# EAGLE board ftpiled5 (EAGLE 7.7.0)
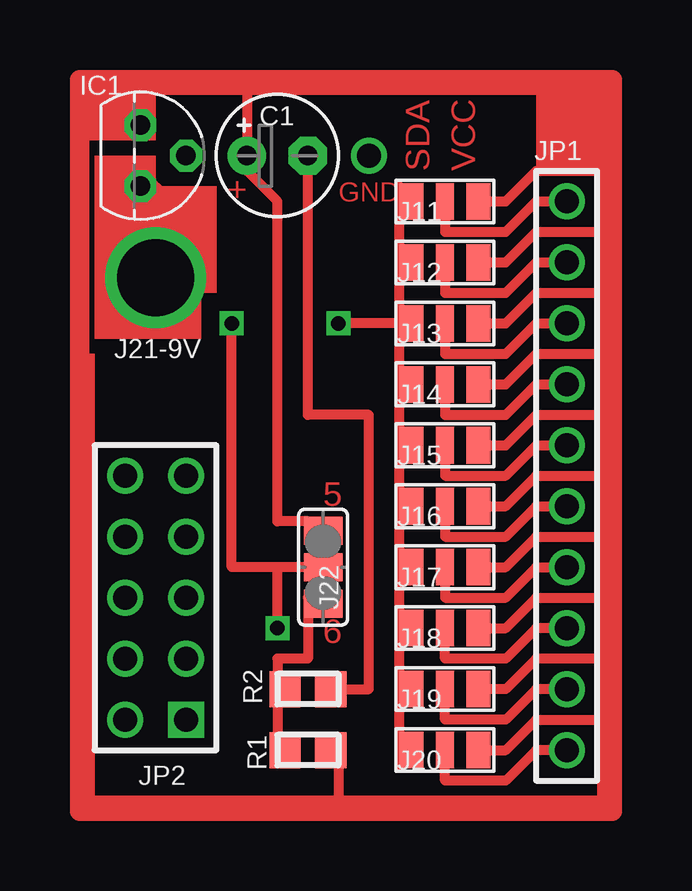
[diagram p0: board, top side]
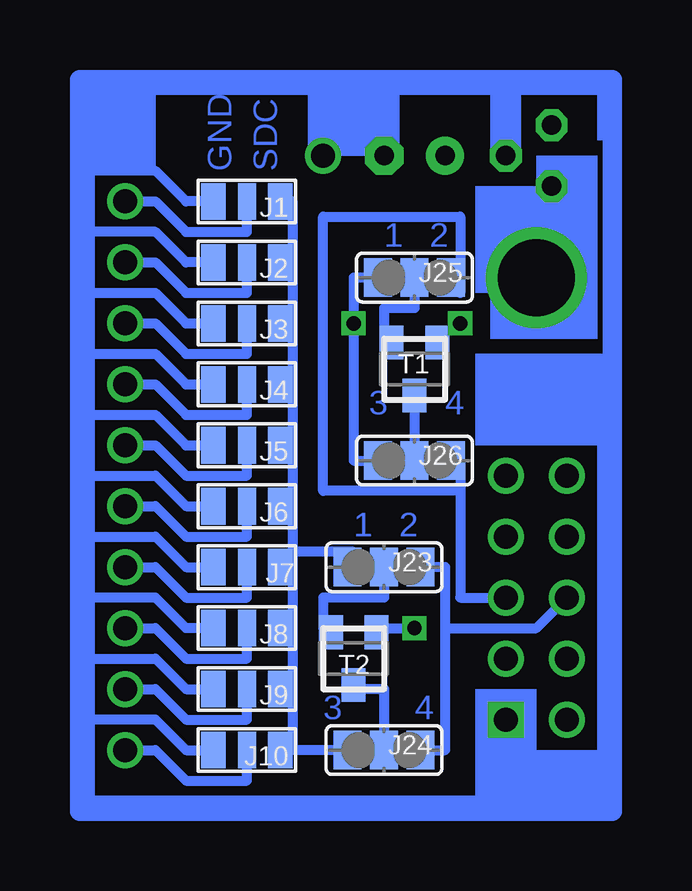
[diagram p1: board, bottom side, seen from below]

No outline drawn. Coordinates in mm, seen from the top.
Copper layers (1*16): Top 0.035mm / dielectric 1.5mm / Bottom 0.035mm
Design rules "default": minimum track width 10mil, minimum drill 24mil, track to track 8mil, track to pad 8mil, pad to pad 8mil, via to via 8mil, smd to smd 8mil, copper to edge 40mil, drill to drill 8mil, minimum pad ring 10mil, minimum via ring 8mil, stop-mask expansion 4mil, vias tented up to drill 0mil, thermal gap 10mil

## Footprints (pad centres in the part's own frame; a part is rotated, then mirrored left to right if it is on the bottom)
E2,5-5 = drill 0.813 pad 1.6: + -1.27,0 | drill 0.813 pad 1.6 octagon: - 1.27,0
TO92 = drill 0.813 octagon: 1 -1.27,0; 2 0,1.905; 3 1.27,0
JUMP-3 = smd 1.016 x 1.524: 1 -1.397,0; 3 1.397,0 | smd 0.762 x 1.524: 2 0,0
SJ_2 = smd 1.168 x 1.6: 1 -1.524,0; 2 0,0; 3 1.524,0
R0805 = smd 1.3 x 1.5: 1 -0.95,0; 2 0.95,0
SOT23 = smd 1 x 1.4: 1 -0.95,-1.1; 2 0.95,-1.1; 3 0,1.1

## Placement (x,y rotation side)
C1  [E2,5-5]  11.43,69.22 0 top
IC1  [TO92]  5.71,69.22 270 top
J1  [JUMP-3]  18.41,67.31 0 bottom
J2  [JUMP-3]  18.41,64.77 0 bottom
J3  [JUMP-3]  18.41,62.23 0 bottom
J4  [JUMP-3]  18.41,59.69 0 bottom
J5  [JUMP-3]  18.41,57.15 0 bottom
J6  [JUMP-3]  18.41,54.61 0 bottom
J7  [JUMP-3]  18.41,52.07 0 bottom
J8  [JUMP-3]  18.41,49.53 0 bottom
J9  [JUMP-3]  18.41,46.99 0 bottom
J10  [JUMP-3]  18.41,44.45 0 bottom
J11  [JUMP-3]  18.41,67.31 0 top
J12  [JUMP-3]  18.41,64.77 0 top
J13  [JUMP-3]  18.41,62.23 0 top
J14  [JUMP-3]  18.41,59.69 0 top
J15  [JUMP-3]  18.41,57.15 0 top
J16  [JUMP-3]  18.41,54.61 0 top
J17  [JUMP-3]  18.41,52.07 0 top
J18  [JUMP-3]  18.41,49.53 0 top
J19  [JUMP-3]  18.41,46.99 0 top
J20  [JUMP-3]  18.41,44.45 0 top
J22  [SJ_2]  13.34,52.07 90 top
J23  [SJ_2]  12.7,52.07 0 bottom
J24  [SJ_2]  12.7,44.45 0 bottom
J25  [SJ_2]  11.43,64.14 0 bottom
J26  [SJ_2]  11.43,56.52 0 bottom
R1  [R0805]  12.7,44.45 180 top
R2  [R0805]  12.7,46.99 180 top
T1  [SOT23]  11.43,60.33 180 bottom
T2  [SOT23]  13.97,48.26 180 bottom

## Library data of the parts
C1 = resistor
IC1 = ref-packages
J1-J20 = smd-special
J22-J26 = jumper
R1 R2 = smd-ipc
T1 T2 = semicon-smd-ipc

## Nets
J16: J16.2
S$4: IC1.1
S$6: C1.+
S$9: J1.2
S$11: J23.2
S$12: J11.2
S$16: J12.2
S$17: J25.2
S$18: J13.2
S$21: J14.2
S$23: J15.2
S$27: J17.2
S$31: J19.2
S$32: J20.2
S$33: J2.2
S$36: J3.2
S$38: J26.2
S$40: J4.2
S$41: C1.- IC1.2
S$48: J5.2
S$49: J6.2
S$50: J7.2
S$51: J8.2
S$56: IC1.3
S$57: J9.2
S$58: J18.2
S$64: J10.2

## Tracks (layer width: path | path; a pad name or v marks a point on that pad's centre or on a via)
J16
  Top 0.406: J16.2 18.41,53.34 20.95,53.34 22.23,54.61 23.5,54.61
JP21  (via drill 3.2)
  Bottom 0.406: 6.35,67.31 v6.35,64.14
S$1
  Bottom 0.406: 16.51,67.31 16.51,52.7 | 16.51,52.7 16.51,44.45 13.97,44.45 | 13.97,52.7 16.51,52.7
S$2
  Top 0.406: 12.7,50.8 12.7,48.26 11.43,48.26 11.43,44.45
S$3
  Bottom 0.406: 19.68,67.31 20.95,67.31 22.23,68.58 25.4,68.58
S$4
  Top 0.406: IC1.1 3.17,70.48 | 13.97,44.45 13.97,41.91
  Top 0.813: 3.17,72.39 25.4,72.39 25.4,41.91 13.97,41.91 3.17,41.91 3.17,70.48 3.17,72.39
S$5  (via drill 1)
  other vias: 7.62,48.26
S$6
  Top 0.406: 12.7,53.98 11.43,53.98 11.43,67.31 10.16,68.58 C1.+ 10.16,72.39
S$8  (via drill 1)
  other vias: 15.24,69.22
S$9
  Bottom 0.406: 23.5,67.31 22.23,67.31 20.95,66.04 18.41,66.04 J1.2
S$10
  Bottom 0.406: 19.68,64.77 20.95,64.77 22.23,66.04 25.4,66.04
S$11
  Bottom 0.406: J23.2 12.7,50.8 15.24,50.8 15.24,49.53
S$12  (via drill 1)
  Top 0.406: J11.2 18.41,66.04 20.95,66.04 22.23,67.31 v23.5,67.31
S$13
  Top 0.406: 19.68,67.31 20.95,67.31 22.23,68.58 25.4,68.58
S$14
  Top 0.406: 19.68,64.77 20.95,64.77 22.23,66.04 25.4,66.04
S$15
  Top 0.406: 19.68,62.23 20.95,62.23 22.23,63.5 25.4,63.5
S$16
  Top 0.406: J12.2 18.41,63.5 20.95,63.5 22.23,64.77 23.5,64.77
S$17
  Bottom 0.406: J25.2 11.43,62.87 12.7,62.87 12.7,61.59
S$18
  Top 0.406: J13.2 18.41,60.96 20.95,60.96 22.23,62.23 23.5,62.23
S$19
  Top 0.406: 19.68,59.69 20.95,59.69 22.23,60.96 25.4,60.96
S$20  (via drill 0.6)
  Top 0.406: 16.51,43.81 16.51,62.23 | 16.51,62.23 16.51,67.94 | 16.51,62.23 v13.97,62.23
  Bottom 0.406: 12.7,64.14 13.97,64.14 v13.97,62.23 13.97,56.52 12.7,56.52
S$21
  Top 0.406: J14.2 18.41,58.42 20.95,58.42 22.23,59.69 23.5,59.69
S$22
  Top 0.406: 19.68,57.15 20.95,57.15 22.23,58.42 25.4,58.42
S$23
  Top 0.406: J15.2 18.41,55.88 20.95,55.88 22.23,57.15 23.5,57.15
S$24
  Top 0.406: 19.68,54.61 20.95,54.61 22.23,55.88 25.4,55.88
S$26
  Top 0.406: 19.68,52.07 20.95,52.07 22.23,53.34 25.4,53.34
S$27
  Top 0.406: J17.2 18.41,50.8 20.95,50.8 22.23,52.07 23.5,52.07
S$28
  Top 0.406: 19.68,49.53 20.95,49.53 22.23,50.8 25.4,50.8
S$29
  Top 0.406: 25.4,48.26 22.23,48.26 20.95,46.99 19.68,46.99
S$30
  Top 0.406: 19.68,44.45 20.95,44.45 22.23,45.72 25.4,45.72
S$31
  Top 0.406: 23.5,46.99 22.23,46.99 20.95,45.72 18.41,45.72 J19.2
S$32
  Top 0.406: 23.5,44.45 22.23,44.45 20.95,43.18 18.41,43.18 J20.2
S$33
  Bottom 0.406: 23.5,64.77 22.23,64.77 20.95,63.5 18.41,63.5 J2.2
S$34
  Bottom 0.406: 25.4,63.5 22.23,63.5 20.95,62.23 19.68,62.23
S$35
  Bottom 0.406: 25.4,60.96 22.23,60.96 20.95,59.69 19.68,59.69
S$36
  Bottom 0.406: 23.5,62.23 22.23,62.23 20.95,60.96 18.41,60.96 J3.2
S$37
  Bottom 0.406: 12.7,44.45 12.7,46.99 13.97,46.99
S$38
  Bottom 0.406: 11.43,59.05 J26.2
S$39  (via drill 1)
  other vias: 7.62,55.88
S$40
  Bottom 0.406: 22.86,59.69 22.23,59.69 20.95,58.42 18.41,58.42 J4.2
S$41
  Top 0.406: 13.97,46.99 15.24,46.99 15.24,58.42 12.7,58.42 C1.-
  Bottom 0.406: C1.- 12.7,72.39 | 19.68,44.45 20.95,44.45 22.23,45.72 25.4,45.72 | 7.62,45.72 7.62,41.91 | 7.62,72.39 IC1.2
  Bottom 0.813: 7.62,41.91 25.4,41.91 25.4,45.72 25.4,72.39 12.7,72.39 7.62,72.39 3.17,72.39 3.17,41.91 7.62,41.91
S$42
  Bottom 0.406: 25.4,58.42 22.23,58.42 20.95,57.15 19.68,57.15
S$43  (via drill 1)
  other vias: 5.08,55.88
S$44
  Bottom 0.406: 25.4,55.88 22.23,55.88 20.95,54.61 19.68,54.61
S$45
  Bottom 0.406: 25.4,53.34 22.23,53.34 20.95,52.07 19.68,52.07
S$46
  Bottom 0.406: 19.68,49.53 20.95,49.53 22.23,50.8 25.4,50.8
S$47
  Bottom 0.406: 25.4,48.26 22.23,48.26 20.95,46.99 19.68,46.99
S$48
  Bottom 0.406: 23.5,57.15 22.23,57.15 20.95,55.88 18.41,55.88 J5.2
S$49
  Bottom 0.406: 23.5,54.61 22.23,54.61 20.95,53.34 18.41,53.34 J6.2
S$50
  Bottom 0.406: 23.5,52.07 22.23,52.07 20.95,50.8 18.41,50.8 J7.2
S$51
  Bottom 0.406: 23.5,49.53 22.23,49.53 20.95,48.26 18.41,48.26 J8.2
S$52  (via drill 0.6)
  Top 0.406: v11.43,49.53 11.43,52.07 9.53,52.07 v9.53,62.23
  Bottom 0.406: 12.7,49.53 v11.43,49.53
S$53  (via drill 1)
  other vias: 5.08,53.34
S$54  (via drill 1)
  other vias: 7.62,53.34
S$55  (via drill 1)
  other vias: 5.08,50.8
S$56
  Top 1.27: IC1.3 6.35,67.31
S$57
  Bottom 0.406: 23.5,46.99 22.23,46.99 20.95,45.72 18.41,45.72 J9.2
S$58
  Top 0.406: 23.5,49.53 22.23,49.53 20.95,48.26 18.41,48.26 J18.2
S$59  (via drill 1)
  other vias: 7.62,50.8
S$60  (via drill 1)
  other vias: 7.62,45.72
S$61
  Top 0.406: 12.7,52.07 11.43,52.07
S$62  (via drill 1)
  other vias: 5.08,48.26
S$63  (via drill 1)
  other vias: 5.08,45.72
S$64
  Bottom 0.406: 23.5,44.45 22.23,44.45 20.95,43.18 18.41,43.18 J10.2
S$65  (via drill 1)
  other vias: 23.5,46.99
S$66
  Bottom 0.406: 10.16,56.52 9.53,56.52 9.53,55.24 | 9.53,55.24 9.53,50.8 7.62,50.8 | 9.53,55.24 15.24,55.24 15.24,66.67 9.53,66.67 9.53,63.5
S$67  (via drill 1)
  other vias: 23.5,52.07
S$68  (via drill 1)
  other vias: 23.5,54.61
S$69
  Bottom 0.406: 11.43,52.07 10.16,52.07 10.16,49.53 | 10.79,44.45 10.16,44.45 10.16,49.53 | 10.16,49.53 6.35,49.53 5.08,50.8
S$70  (via drill 1)
  other vias: 23.5,57.15
S$71  (via drill 1)
  other vias: 23.5,59.69
S$72  (via drill 1)
  other vias: 23.5,62.23
S$73  (via drill 1)
  other vias: 23.5,64.77
S$74  (via drill 1)
  other vias: 23.5,49.53
S$75  (via drill 1)
  other vias: 23.5,44.45
(copper drawn outside any net)
  shapes: Bottom area x19, Top area x9

## Text on the board
Top: SDA | VCC | + | GND | 5 | 6
Bottom: SDC | GND | 2 | 1 | 4 | 3 | 2 | 1 | 4 | 3
tPlace: JP1 | J21-9V | JP2